# EAGLE board PCB_V2 (EAGLE 9.7.0)
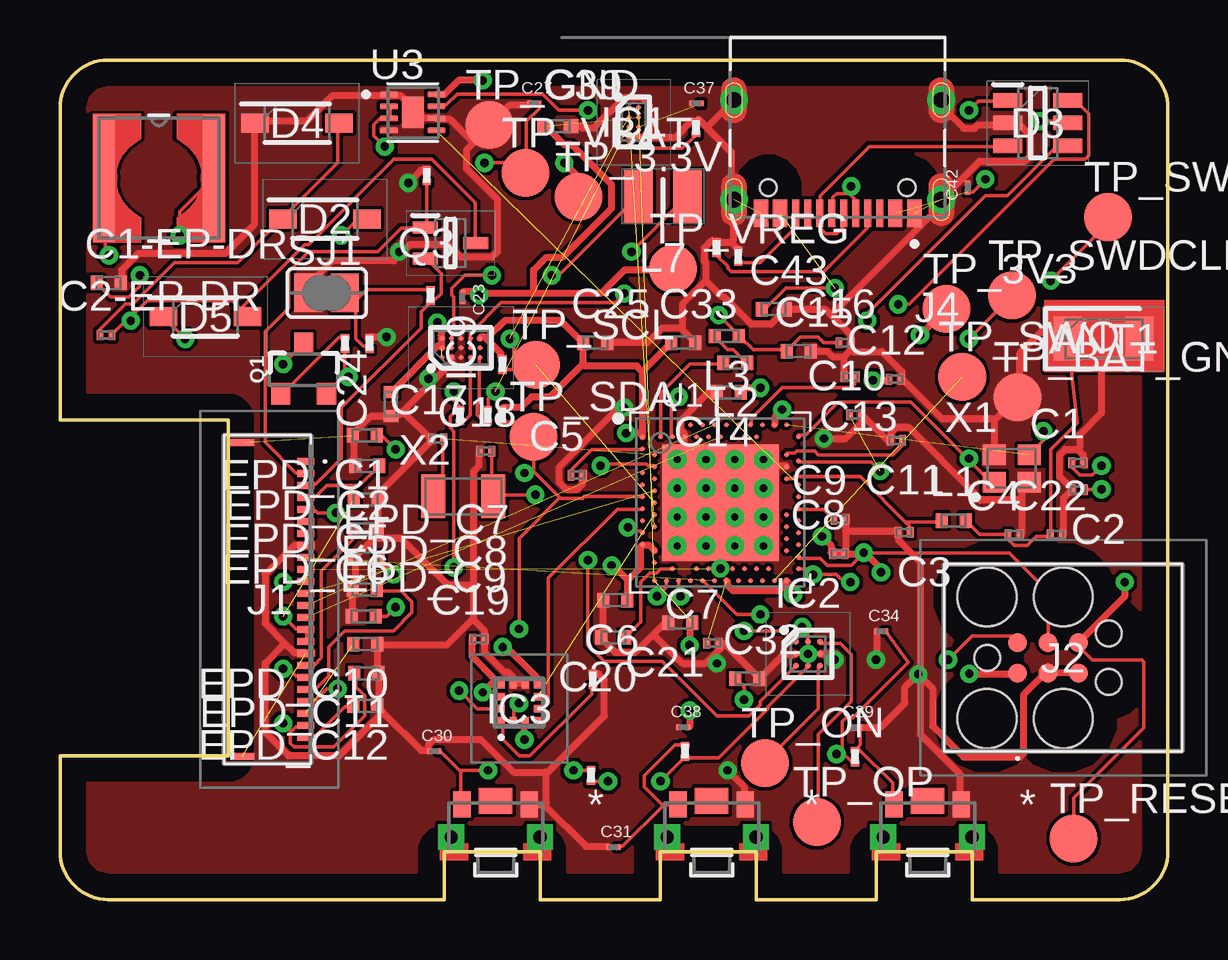
[diagram p0: board, top side]
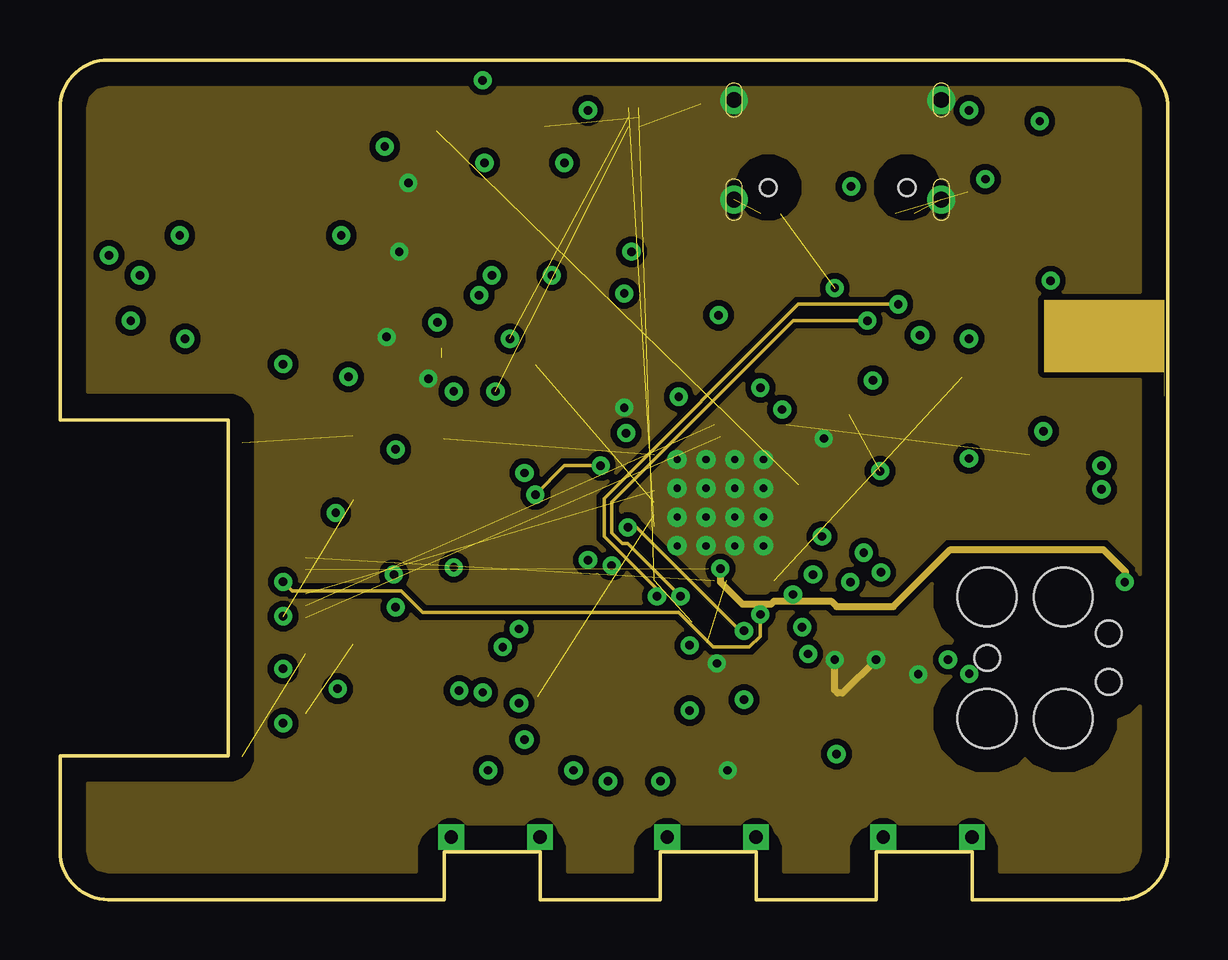
[diagram p1: board, inner layer Route2]
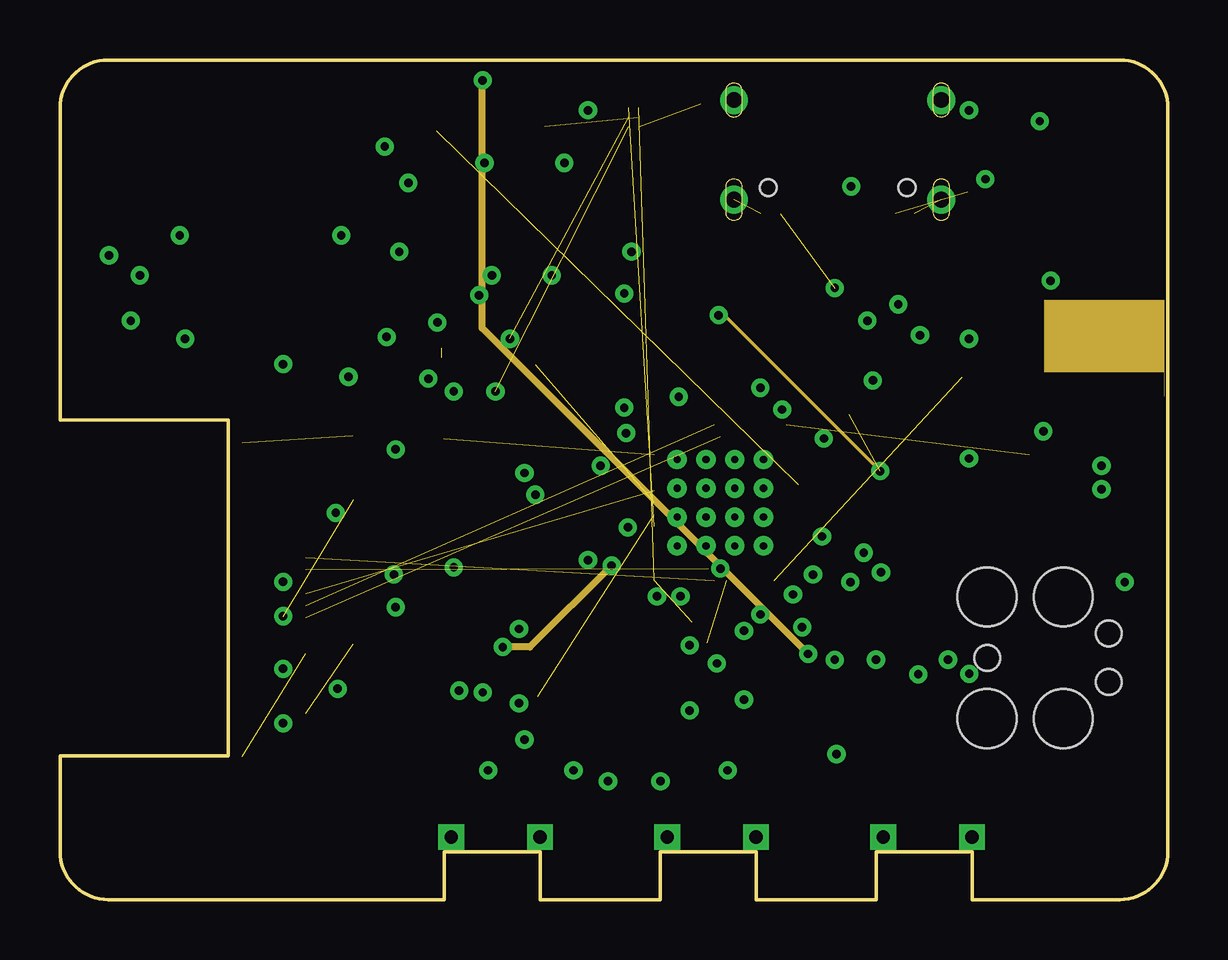
[diagram p2: board, inner layer Route63]
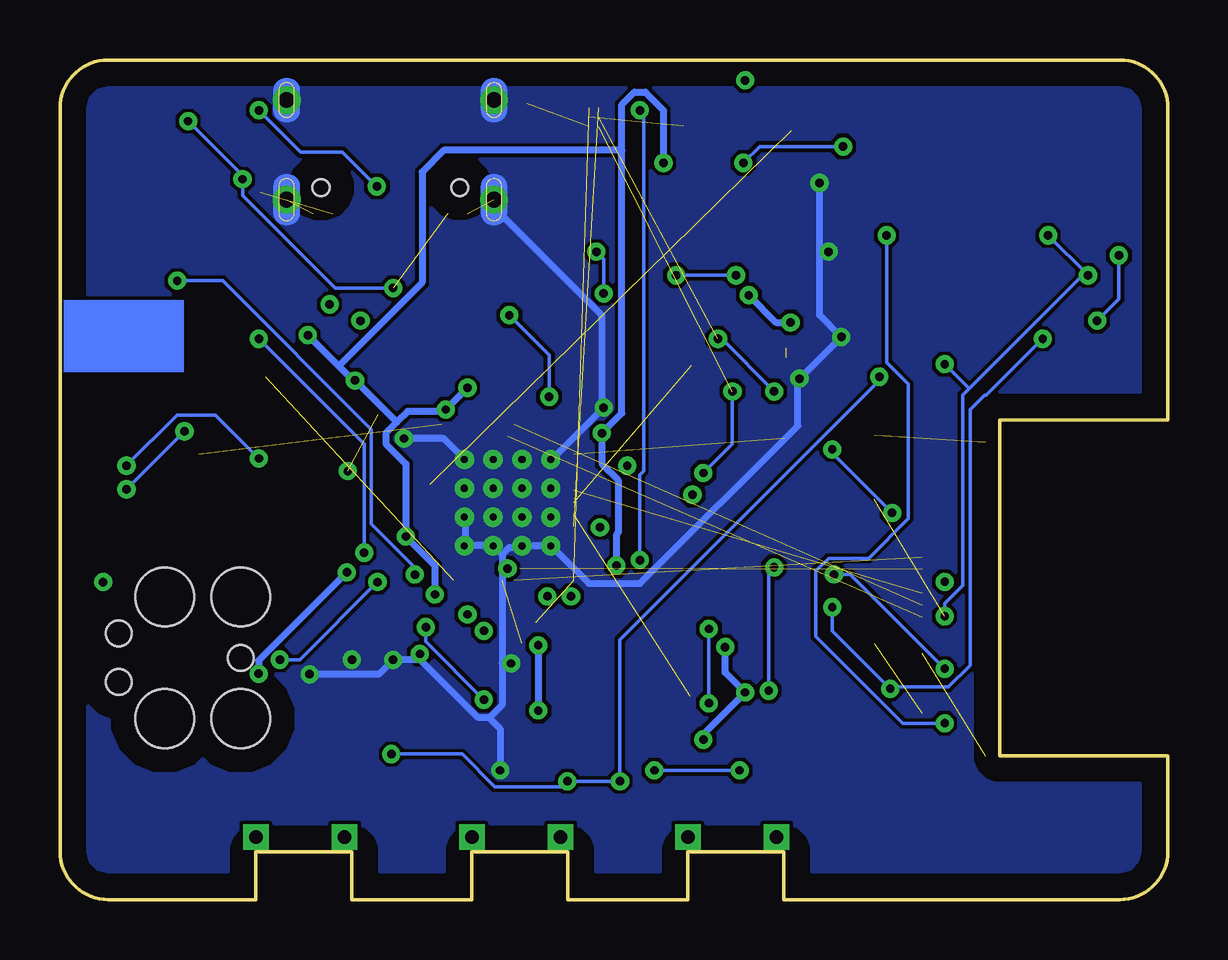
[diagram p3: board, bottom side, seen from below]

Size 46.16 x 35 mm. Coordinates in mm from the lower left corner, seen from the top.
Outline: 0,33 0,20 7,20 7,6 0,6 0,2 arc90 2,0 16,0 16,2 20,2 20,0 25,0 25,2 29,2 29,0 34,0 34,2 38,2 38,0 44.16,0 arc90 46.16,2 46.16,33 arc90 44.16,35 2,35 arc90 0,33
Copper layers (1+2*15+16): Top / Route2 / Route63 / Bottom
Stack-up 4 Layer Stack: Top SilkScreen Epoxy Ink / Top SolderMask SR:Green 0.0254mm Dk 4.3 / Top Surface Finish Lead-Free 0.02mm / Top CuFoil:007 0.035mm / Dielectric-1 Prepreg:001 0.064mm / Dielectric-2 Prepreg:001 0.064mm / Route2 CuFoil:007 0.035mm / Dielectric-3 Core:066 0.711mm / Route63 CuFoil:007 0.035mm / Dielectric-4 Prepreg:001 0.064mm / Dielectric-5 Prepreg:001 0.064mm / Bottom CuFoil:007 0.035mm / Bottom Surface Finish Lead-Free 0.02mm / Bottom SolderMask SR:Green 0.0254mm Dk 4.3 / Bottom SilkScreen Epoxy Ink
Design rules: minimum copper width classes=1 0.3mm, minimum copper width 0.15mm, minimum drill size 0.35mm, copper clearance wire_polygon to wire_polygon 6mil, copper clearance wire_polygon to pad_smd 6mil, copper clearance wire_polygon to via 6mil, copper clearance pad_smd to pad_smd 6mil, copper clearance pad_smd to via 6mil, copper clearance via to via 6mil, copper clearance smd to pad (same net) 6mil, copper clearance smd to via (same net) 6mil, copper clearance smd to smd (same net) 6mil, dimension clearance 40mil, via restrict clearance 0mil, restrict clearance 0mil, drill distance 6mil, keepout clearance 0mil
Net classes: 1 POWER: width 0.3 mm

## Footprints (pad centres in the part's own frame; a part is rotated, then mirrored left to right if it is on the bottom)
2450AT18B100E_ANTC3216X140N = smd 1.15 x 1.8: 1 -1.5,0; 2 1.5,0
NORDIC_NRF_3_RESC0201_L = smd 0.28 x 0.43: 1 -0.255,0; 2 0.255,0
NORDIC_NRF_3_RESC0402_L = smd 0.5 x 0.6: 1 -0.5,0; 2 0.5,0
GRM011R60J152KE01L_2_CAPC0201X13N = smd 0.22 x 0.23: 1 -0.185,0; 2 0.185,0
NORDIC_NRF_3_RESC0402_N = smd 0.6 x 0.6: 1 -0.55,0; 2 0.55,0
ESP32_C6_LIBRARY_5_SOD3716X135N = smd 1.15 x 0.8: 1 -1.75,0; 2 1.75,0
ESP32_C6_LIBRARY_3_SOT95P280X145-6N = smd 1.2 x 0.6: 1 -1.25,0.95; 2 -1.25,0; 3 -1.25,-0.95; 4 1.25,-0.95; 5 1.25,0; 6 1.25,0.95
BQ25180YBGR_BGA8C40P2X4_100X155X50 = smd 0.2 x 0.2: A1 -0.2,0.6; A2 0.2,0.6; B1 -0.2,0.2; B2 0.2,0.2; C1 -0.2,-0.2; C2 0.2,-0.2; D1 -0.2,-0.6; D2 0.2,-0.6
DRV2605YZFR_BGA9C50P3X3_144X144X62 = smd 0.25 x 0.25: A1 -0.5,0.5; A2 0,0.5; A3 0.5,0.5; B1 -0.5,0; B2 0,0; B3 0.5,0; C1 -0.5,-0.5; C2 0,-0.5; C3 0.5,-0.5
BMA423_BMA423 = smd 0.3 x 0.35: 1 -0.75,-0.775; 2 -0.25,-0.775; 3 0.25,-0.775; 4 0.75,-0.775; 7 0.75,0.775; 8 0.25,0.775; 9 -0.25,0.775; 10 -0.75,0.775 | smd 0.35 x 0.3: 5 0.775,-0.25; 6 0.775,0.25; 11 -0.775,0.25; 12 -0.775,-0.25
RT6160AWSC_BGA15C40P3X5_140X230X60 = smd 0.216 x 0.216: A1 -0.4,0.8; A2 0,0.8; A3 0.4,0.8; B1 -0.4,0.4; B2 0,0.4; B3 0.4,0.4; C1 -0.4,0; C2 0,0; C3 0.4,0; D1 -0.4,-0.4; D2 0,-0.4; D3 0.4,-0.4; E1 -0.4,-0.8; E2 0,-0.8; E3 0.4,-0.8
503480-2400_5034802400 = smd 0.3 x 0.7: 1 -5.75,1.525; 2 -5.25,1.525; 3 -4.75,1.525; 4 -4.25,1.525; 5 -3.75,1.525; 6 -3.25,1.525; 7 -2.75,1.525; 8 -2.25,1.525; 9 -1.75,1.525; 10 -1.25,1.525; 11 -0.75,1.525; 12 -0.25,1.525; 13 0.25,1.525; 14 0.75,1.525; 15 1.25,1.525; 16 1.75,1.525; 17 2.25,1.525; 18 2.75,1.525; 19 3.25,1.525; 20 3.75,1.525; 21 4.25,1.525; 22 4.75,1.525; 23 5.25,1.525; 24 5.75,1.525 | smd 0.3 x 1: MP1 -6.54,-1.125; MP2 6.54,-1.125
TC2030-IDC_TC2030IDC = smd 0.783 x 0.783: 1 -0.953,-0.635; 2 -0.953,0.635; 3 0.317,-0.635; 4 0.317,0.635; 5 1.588,-0.635; 6 1.588,0.635 | hole 2.451: -2.223,-2.54; -2.223,2.54; 0.952,-2.54; 0.952,2.54 | hole 1.067: -2.223,0; 2.857,-1.016; 2.857,1.016
KH-TYPE-C-16P_KINGHELM_KH-TYPE-C-16P = smd 0.6 x 1.15: A1_B12 -3.2,4.725; A4_B9 -2.4,4.725; A9_B4 2.4,4.725; A12_B1 3.2,4.725 | smd 0.3 x 1.15: A5 -1.25,4.725; A6 -0.25,4.725; A7 0.25,4.725; A8 1.25,4.725; B5 1.75,4.725; B6 0.75,4.725; B7 -0.75,4.725; B8 -1.75,4.725 | drill 0.65 pad 1.05: SH1 -4.32,0; SH2 4.32,0; SH3 -4.32,4.15; SH4 4.32,4.15 | hole 0.7: -2.89,3.65; 2.89,3.65
NORDIC_NRF_2_RESC0402_L = smd 0.5 x 0.6: 1 -0.5,0; 2 0.5,0
ESP32_C6_LIBRARY_2_IND_4828-WE-TPC_WRE = smd 0.9 x 5.3: 1 -2.286,0; 2 2.286,0
MLP2016SR47MT0S1_INDC2016X100N = smd 1.2 x 2.2: 1 -1.028,0; 2 1.028,0
ESP32_C6_LIBRARY_4_ESP32_C6_LIBRARY_4_ESP32_C6_LIBRARY_4_ESP32_C6_LIBRARY_4_ESP32_WROVER_SPARKFUN-DISCRETESEMI_SOT23-3 = smd 0.8 x 0.9: 1 -0.95,-1; 2 0.95,-1; 3 0,1.1
ESP32_C6_LIBRARY_6_SOT65P210X110-3N = smd 1.05 x 0.5: 1 -1.05,0.65; 2 -1.05,-0.65; 3 1.05,0
CPF0201D7K68C1_0201 = smd 0.35 x 0.25: 1 0,0.275; 2 0,-0.275
ERA-1AEB3401C_0201 = smd 0.35 x 0.25: 1 0,0.275; 2 0,-0.275
ESP32_C6_LIBRARY_7_JUMPER_SJ = smd 1.168 x 1.6: 1 -0.762,0; 2 0.762,0
2025-10-22_07-23-44_LIBRARY_SW_EVP-AKE31A_PAN = smd 0.711 x 1.092: 1 -1.4,-0.972; 2 1.4,-0.972 | drill 0.559 pad 0.914 square: 3 -1.848,0.381; 4 1.848,0.381 | smd 1.397 x 1.092: 5 0,-1.124
HECTOR_WATCH_1_TP20R = smd 2 x 2: TP 0,0
NORDIC_NRF_4_AQFN50P700X700X85_HS-74N = smd 4.85 x 4.85: P$74 0,0 | drill 0.3 pad 0.6: P$75 -1.8,1.8; P$76 -0.6,1.8; P$77 0.6,1.8; P$78 1.8,1.8; P$79 -1.8,0.6; P$80 -0.6,0.6; P$81 0.6,0.6; P$82 1.8,0.6; P$83 -1.8,-0.6; P$84 -0.6,-0.6; P$85 0.6,-0.6; P$86 1.8,-0.6; P$87 -1.8,-1.8; P$88 -0.6,-1.8; P$89 0.6,-1.8; P$90 1.8,-1.8 | smd 0.2 x 0.2: P$A8 -1.25,3.25; P$A10 -0.75,3.25; P$A12 -0.25,3.25; P$A14 0.25,3.25; P$A16 0.75,3.25; P$A18 1.25,3.25; P$A20 1.75,3.25; P$A22 2.25,3.25; P$A23 2.75,3.25; P$AA24 3.25,-2.25; P$AB2 -2.75,-2.5; P$AC5 -2,-2.75; P$AC9 -1,-2.75; P$AC11 -0.5,-2.75; P$AC13 0,-2.75; P$AC15 0.5,-2.75; P$AC17 1,-2.75; P$AC19 1.5,-2.75; P$AC21 2,-2.75; P$AC24 3.25,-2.75; P$AD2 -2.75,-3.25; P$AD4 -2.25,-3.25; P$AD6 -1.75,-3.25; P$AD8 -1.25,-3.25; P$AD10 -0.75,-3.25; P$AD12 -0.25,-3.25; P$AD14 0.25,-3.25; P$AD16 0.75,-3.25; P$AD18 1.25,-3.25; P$AD20 1.75,-3.25; P$AD22 2.25,-3.25; P$AD23 2.75,-3.25; P$B1 -3.25,2.75; P$B3 -2.5,2.75; P$B5 -2,2.75; P$B7 -1.5,2.75; P$B9 -1,2.75; P$B11 -0.5,2.75; P$B13 0,2.75; P$B15 0.5,2.75; P$B17 1,2.75; P$B19 1.5,2.75; P$B24 3.25,2.75; P$C1 -3.25,2.25; P$D2 -2.75,2; P$D23 2.75,2; P$E24 3.25,1.75; P$F2 -2.75,1.5; P$F23 2.75,1.5; P$G1 -3.25,1.25; P$H2 -2.75,1; P$H23 2.75,1; P$J1 -3.25,0.75; P$J24 3.25,0.75; P$K2 -2.75,0.5; P$L1 -3.25,0.25; P$L24 3.25,0.25; P$M2 -2.75,0; P$N1 -3.25,-0.25; P$N24 3.25,-0.25; P$P2 -2.75,-0.5; P$P23 2.75,-0.5; P$R1 -3.25,-0.75; P$R24 3.25,-0.75; P$T2 -2.75,-1; P$T23 2.75,-1; P$U1 -3.25,-1.25; P$U24 3.25,-1.25; P$V23 2.75,-1.5; P$W1 -3.25,-1.75; P$W24 3.25,-1.75; P$Y2 -2.75,-2; P$Y23 2.75,-2
ESP32_C6_LIBRARY_SON50P200X200X80-9N = smd 0.76 x 0.27: 1 -0.985,0.75; 2 -0.985,0.25; 3 -0.985,-0.25; 4 -0.985,-0.75; 5 0.985,-0.75; 6 0.985,-0.25; 7 0.985,0.25; 8 0.985,0.75 | smd 0.9 x 1.3: 9 0,0
NORDIC_NRF_BT-XTAL_2016_N = smd 0.95 x 0.85: 1 -0.725,-0.575; 2 0.725,-0.575; 3 0.725,0.575; 4 -0.725,0.575
NORDIC_NRF_1_XTAL_3215_N = smd 1 x 1.8: 1 -1.25,0; 2 1.25,0

## Placement (x,y rotation side)
ANT1  2450AT18B100E_2450AT18B100E  [2450AT18B100E_ANTC3216X140N]  43.49,23.38 0 top
C1  12pF  [NORDIC_NRF_3_RESC0201_L]  42.41,18.21 0 top
C1-EP-DR  10uF  [NORDIC_NRF_3_RESC0402_L]  2.04,25.71 0 top
C2  12pF  [NORDIC_NRF_3_RESC0201_L]  42.42,17.08 180 top
C2-EP-DR  4.7uF/25V  [NORDIC_NRF_3_RESC0201_L]  1.92,23.53 0 top
C3  1pF  [NORDIC_NRF_3_RESC0201_L]  35.17,15.31 180 top
C4  1pF  [NORDIC_NRF_3_RESC0201_L]  39.75,15.21 0 top
C5  100nF  [NORDIC_NRF_3_RESC0201_L]  21.55,17.69 0 top
C6  4.7uF  [NORDIC_NRF_3_RESC0402_L]  23.14,12.48 180 top
C7  100nF  [NORDIC_NRF_3_RESC0201_L]  27.2,10.69 0 top
C8  100nF  [NORDIC_NRF_3_RESC0201_L]  32.45,14.41 0 top
C9  820pF  [NORDIC_NRF_3_RESC0201_L]  32.5,15.86 0 top
C10  N.C.  [NORDIC_NRF_3_RESC0201_L]  33.15,20.21 0 top
C11  100pF  [NORDIC_NRF_3_RESC0201_L]  34.85,19.14 180 top
C12  100nF  [NORDIC_NRF_3_RESC0201_L]  34.8,21.69 0 top
C13  N.C.  [NORDIC_NRF_3_RESC0201_L]  32.93,21.79 180 top
C14  4.7uF  [NORDIC_NRF_3_RESC0402_L]  27.87,21.14 180 top
C15  1.0uF  [NORDIC_NRF_3_RESC0402_L]  30.78,22.86 0 top
C16  47nF  [NORDIC_NRF_3_RESC0201_L]  32.71,23.21 0 top
C17  12pF  [NORDIC_NRF_3_RESC0201_L]  15.73,19.21 0 top
C18  12pF  [NORDIC_NRF_3_RESC0201_L]  17.73,18.69 0 top
C19  100nF  [NORDIC_NRF_3_RESC0201_L]  17.45,10.86 0 top
C20  4.7uF  [NORDIC_NRF_3_RESC0402_L]  23.05,10.93 180 top
C21  4.7uF  [NORDIC_NRF_3_RESC0402_L]  25.84,11.54 180 top
C22  N.C.  [NORDIC_NRF_3_RESC0201_L]  41.51,15.21 0 top
C23  0.1uF  [GRM011R60J152KE01L_2_CAPC0201X13N]  16.76,25.11 270 top
C24  10uF  [NORDIC_NRF_3_RESC0402_L]  13.79,20.66 90 top
C25  22uF  [NORDIC_NRF_3_RESC0402_L]  22.31,23.21 0 top
C27  0.1uF  [GRM011R60J152KE01L_2_CAPC0201X13N]  19.76,33.18 0 top
C29  1uF  [GRM011R60J152KE01L_2_CAPC0201X13N]  33.14,7.18 0 top
C30  1uF  [GRM011R60J152KE01L_2_CAPC0201X13N]  15.6,6.18 0 top
C31  1uF  [GRM011R60J152KE01L_2_CAPC0201X13N]  23.06,2.18 0 top
C32  1uF  [NORDIC_NRF_3_RESC0402_L]  28.64,9.21 0 top
C33  22uF  [NORDIC_NRF_3_RESC0402_L]  25.96,23.21 0 top
C34  0.1uF  [GRM011R60J152KE01L_2_CAPC0201X13N]  34.22,11.18 0 top
C37  1uF  [GRM011R60J152KE01L_2_CAPC0201X13N]  26.52,33.18 0 top
C38  1uF  [GRM011R60J152KE01L_2_CAPC0201X13N]  25.98,7.18 0 top
C39  10uF  [NORDIC_NRF_3_RESC0402_N]  20.74,32.24 0 top
C42  0.1uF  [GRM011R60J152KE01L_2_CAPC0201X13N]  37.82,29.68 90 top
C43  4.7uF  [NORDIC_NRF_3_RESC0402_L]  29.73,24.61 0 top
D2  MBR0530  [ESP32_C6_LIBRARY_5_SOD3716X135N]  11.04,28.37 0 top
D3  USBLC6-2SC6Y  [ESP32_C6_LIBRARY_3_SOT95P280X145-6N]  40.74,32.37 0 top
D4  MBR0530  [ESP32_C6_LIBRARY_5_SOD3716X135N]  9.88,32.37 0 top
D5  MBR0530  [ESP32_C6_LIBRARY_5_SOD3716X135N]  6.06,24.3 0 top
EPD_C1  1uF/50V  [NORDIC_NRF_3_RESC0402_L]  12.71,19.35 180 top
EPD_C2  1uF/50V  [NORDIC_NRF_3_RESC0402_L]  12.8,18.08 180 top
EPD_C5  0.1uF/50V  [NORDIC_NRF_3_RESC0402_L]  12.74,16.68 180 top
EPD_C6  1uF/50V  [NORDIC_NRF_3_RESC0402_L]  12.73,15.42 180 top
EPD_C7  1uF/50V  [NORDIC_NRF_3_RESC0402_L]  12.78,14.22 0 top
EPD_C8  1uF/50V  [NORDIC_NRF_3_RESC0402_L]  12.7,12.92 0 top
EPD_C9  1uF/50V  [NORDIC_NRF_3_RESC0402_L]  12.66,11.81 0 top
EPD_C10  1uF/50V  [NORDIC_NRF_3_RESC0402_L]  12.71,10.65 180 top
EPD_C11  1uF/50V  [NORDIC_NRF_3_RESC0402_L]  12.76,9.44 180 top
EPD_C12  1uF/50V  [NORDIC_NRF_3_RESC0402_L]  12.72,8.08 180 top
IC1  BQ25180YBGR_BQ25180YBGR  [BQ25180YBGR_BGA8C40P2X4_100X155X50]  23.91,32.41 0 top
IC2  DRV2605YZFR  [DRV2605YZFR_BGA9C50P3X3_144X144X62]  31.17,10.24 0 top
IC3  BMA421  [BMA423_BMA423]  19.13,8.21 0 top
IC9  RT6160AWSC  [RT6160AWSC_BGA15C40P3X5_140X230X60]  16.71,23 90 top
J1  503480-2400  [503480-2400_5034802400]  8.72,12.51 270 top
J2  TC2030-IDC_TC2030-IDC  [TC2030-IDC_TC2030IDC]  40.85,10.08 0 top
J4  KH-TYPE-C-16P  [KH-TYPE-C-16P_KINGHELM_KH-TYPE-C-16P]  32.4,33.33 180 top
L1  3.9nH  [NORDIC_NRF_2_RESC0402_L]  37.24,15.8 0 top
L2  10uH  [NORDIC_NRF_2_RESC0402_L]  28.14,22.38 180 top
L3  15nH  [NORDIC_NRF_2_RESC0402_L]  27.79,23.49 180 top
L5  68uH  [ESP32_C6_LIBRARY_2_IND_4828-WE-TPC_WRE]  4.12,30.07 0 top
L7  FTC252012SR47MBCA  [MLP2016SR47MT0S1_INDC2016X100N]  25.12,29.32 0 top
Q1  20V/4.2A/52mΩ/1.4W  [ESP32_C6_LIBRARY_4_ESP32_C6_LIBRARY_4_ESP32_C6_LIBRARY_4_ESP32_C6_LIBRARY_4_ESP32_WROVER_SPARKFUN-DISCRETESEMI_SOT23-3]  10.15,22.08 0 top
Q3  SI1308EDL-T1-GE3  [ESP32_C6_LIBRARY_6_SOT65P210X110-3N]  16.27,27.37 0 top
R1_EP_DR  0.47  [CPF0201D7K68C1_0201]  15.44,25.18 0 top
R1_TYPE_SEL  2.2  [CPF0201D7K68C1_0201]  12.9,23.18 0 top
R1_USB  5K1  [ERA-1AEB3401C_0201]  27.36,27.18 0 top
R2  0  [ERA-1AEB3401C_0201]  17.82,20.18 0 top
R2_EP_DR  10K  [CPF0201D7K68C1_0201]  15.28,30.18 0 top
R2_USB  5K1  [CPF0201D7K68C1_0201]  28.26,26.82 180 top
R3  0  [CPF0201D7K68C1_0201]  22.2,9.18 0 top
R4  0  [ERA-1AEB3401C_0201]  16.66,20.18 0 top
R5  10K  [ERA-1AEB3401C_0201]  22.12,5.18 0 top
R7  10K  [ERA-1AEB3401C_0201]  33.13,5.96 0 top
R8  10K  [ERA-1AEB3401C_0201]  26.04,6.18 0 top
R9  10K  [CPF0201D7K68C1_0201]  26.5,32.18 0 top
R17  3K3  [CPF0201D7K68C1_0201]  18.44,22.31 0 top
R18  3K3  [CPF0201D7K68C1_0201]  18.42,20.18 0 top
R_PWR_EPD  10K  [CPF0201D7K68C1_0201]  11.88,23.18 0 top
SJ1  [ESP32_C6_LIBRARY_7_JUMPER_SJ]  11.11,25.29 0 top
SW_DN  2025-10-22_07-23-44_LIBRARY_EVP-AKE31ASW_EVP-AKE31A_PAN  [2025-10-22_07-23-44_LIBRARY_SW_EVP-AKE31A_PAN]  36.15,2.99 180 top
SW_ENT  2025-10-22_07-23-44_LIBRARY_EVP-AKE31ASW_EVP-AKE31A_PAN  [2025-10-22_07-23-44_LIBRARY_SW_EVP-AKE31A_PAN]  27.15,2.99 180 top
SW_UP  2025-10-22_07-23-44_LIBRARY_EVP-AKE31ASW_EVP-AKE31A_PAN  [2025-10-22_07-23-44_LIBRARY_SW_EVP-AKE31A_PAN]  18.15,2.99 180 top
TP_3.3V  HECTOR_WATCH_1_TPTP20R  [HECTOR_WATCH_1_TP20R]  21.61,29.29 0 top
TP_3V3  HECTOR_WATCH_1_TPTP20R  [HECTOR_WATCH_1_TP20R]  36.94,24.62 0 top
TP_BAT_GND  HECTOR_WATCH_1_TPTP20R  [HECTOR_WATCH_1_TP20R]  39.89,20.94 0 top
TP_GND  HECTOR_WATCH_1_TPTP20R  [HECTOR_WATCH_1_TP20R]  17.89,32.29 0 top
TP_ON  HECTOR_WATCH_1_TPTP20R  [HECTOR_WATCH_1_TP20R]  29.38,5.69 0 top
TP_OP  HECTOR_WATCH_1_TPTP20R  [HECTOR_WATCH_1_TP20R]  31.53,3.23 0 top
TP_RESET  HECTOR_WATCH_1_TPTP20R  [HECTOR_WATCH_1_TP20R]  42.24,2.54 0 top
TP_SCL  HECTOR_WATCH_1_TPTP20R  [HECTOR_WATCH_1_TP20R]  19.83,22.29 0 top
TP_SDA  HECTOR_WATCH_1_TPTP20R  [HECTOR_WATCH_1_TP20R]  19.72,19.29 0 top
TP_SWDCLK  HECTOR_WATCH_1_TPTP20R  [HECTOR_WATCH_1_TP20R]  39.66,25.18 0 top
TP_SWDIO  HECTOR_WATCH_1_TPTP20R  [HECTOR_WATCH_1_TP20R]  43.66,28.45 0 top
TP_SWO  HECTOR_WATCH_1_TPTP20R  [HECTOR_WATCH_1_TP20R]  37.59,21.79 0 top
TP_VBAT  HECTOR_WATCH_1_TPTP20R  [HECTOR_WATCH_1_TP20R]  19.39,30.29 0 top
TP_VREG  HECTOR_WATCH_1_TPTP20R  [HECTOR_WATCH_1_TP20R]  25.55,26.29 0 top
U1  NRF52840_QF  [NORDIC_NRF_4_AQFN50P700X700X85_HS-74N]  27.51,16.55 0 top
U3  MAX17048G+T10  [ESP32_C6_LIBRARY_SON50P200X200X80-9N]  14.7,32.81 0 top
X1  32MHz  [NORDIC_NRF_BT-XTAL_2016_N]  39.66,17.97 0 top
X2  32.768kHz  [NORDIC_NRF_1_XTAL_3215_N]  16.81,16.81 0 top

## Library data of the parts
ANT1 = InkTime_v5; ARROW_PART_NUMBER: 2450AT18B100E; ARROW_PRICE-STOCK: https://www.arrow.com/en/products/2450at18b100e/johanson-dielectrics?utm_currency=USD&region=nac; DESCRIPTION: Antennas 2.45GHz ANTENNA; HEIGHT: 1.4mm; MANUFACTURER_NAME: JOHANSON TECHNOLOGY; MANUFACTURER_PART_NUMBER: 2450AT18B100E; MOUSER_PART_NUMBER: 609-2450AT18B100E; MOUSER_PRICE-STOCK: https://www.mouser.co.uk/ProductDetail/Johanson-Technology/2450AT18B100E?qs=yCnrNFeXz%252Bh5MFsFIXGZGA%3D%3D
C1 C1-EP-DR C2 C2-EP-DR C3-C22 C24 C25 C32 C33 C39 C43 EPD_C1 EPD_C2 EPD_C5-EPD_C12 L1-L3 R1_EP_DR R1_TYPE_SEL R1_USB R2 R2_EP_DR R2_USB R3-R5 R7-R9 R17 R18 R_PWR_EPD SJ1 TP_3.3V TP_3V3 TP_BAT_GND TP_GND TP_ON TP_OP TP_RESET TP_SCL TP_SDA TP_SWDCLK TP_SWDIO TP_SWO TP_VBAT TP_VREG U1 X1 X2 = InkTime_v5
C23 C27 C29-C31 C34 C37 C38 C42 = InkTime_v5; AVAILABILITY: In Stock; CHECK_PRICES: https://www.snapeda.com/parts/GRM011R60J152KE01L/Murata/view-part/?ref=eda; DESCRIPTION: SMD Capacitor X5R(EIA) with Capacitance: 1500pF Tol. 10%. Rated Voltage: 6.3Vdc; MF: Murata; MP: GRM011R60J152KE01L; PACKAGE: 0201 Murata; PRICE: None; SNAPEDA_LINK: https://www.snapeda.com/parts/GRM011R60J152KE01L/Murata/view-part/?ref=snap
D2 D4 D5 = InkTime_v5; AVAILABILITY: In Stock; CHECK_PRICES: https://www.snapeda.com/parts/MBR0530/Onsemi/view-part/?ref=eda; DESCRIPTION: Diode Schottky 30 V 500mA Surface Mount SOD-123; MF: ON Semiconductor; MP: MBR0530; PACKAGE: SOD-123-2 ON Semiconductor; PRICE: None; PURCHASE-URL: https://www.snapeda.com/api/url_track_click_mouser/?unipart_id=179458&manufacturer=ON Semiconductor&part_name=MBR0530&search_term=None; SNAPEDA_LINK: https://www.snapeda.com/parts/MBR0530/Onsemi/view-part/?ref=snap
D3 = InkTime_v5; AVAILABILITY: In Stock; CHECK_PRICES: https://www.snapeda.com/parts/USBLC6-2SC6Y/STMicroelectronics/view-part/?ref=eda; DESCRIPTION: 17V Clamp 5A (8/20µs) Ipp Tvs Diode Surface Mount SOT-23-6; MF: STMicroelectronics; MP: USBLC6-2SC6Y; PACKAGE: SOT-23-6 STMicroelectronics; PRICE: None; SNAPEDA_LINK: https://www.snapeda.com/parts/USBLC6-2SC6Y/STMicroelectronics/view-part/?ref=snap
IC1 = InkTime_v5; ARROW_PART_NUMBER: BQ25180YBGR; ARROW_PRICE-STOCK: https://www.arrow.com/en/products/bq25180ybgr/texas-instruments?utm_currency=USD&region=nac; DESCRIPTION: Charger IC Lithium Ion/Polymer, Lithium Iron Phosphate 8-DSBGA (1.6x1.1); HEIGHT: 0.5mm; MANUFACTURER_NAME: Texas Instruments; MANUFACTURER_PART_NUMBER: BQ25180YBGR; MOUSER_PART_NUMBER: 595-BQ25180YBGR; MOUSER_PRICE-STOCK: https://www.mouser.co.uk/ProductDetail/Texas-Instruments/BQ25180YBGR?qs=doiCPypUmgEWjAK%252BJAX6Tw%3D%3D
IC2 = InkTime_v5; ARROW_PART_NUMBER: DRV2605YZFR; ARROW_PRICE-STOCK: https://www.arrow.com/en/products/drv2605yzfr/texas-instruments?region=nac; DESCRIPTION: Haptic Driver for ERM/LRA with Built-In Library and Smart Loop Architecture; HEIGHT: 0.625mm; MANUFACTURER_NAME: Texas Instruments; MANUFACTURER_PART_NUMBER: DRV2605YZFR
IC3 = InkTime_v5; ARROW_PART_NUMBER: BMA423; ARROW_PRICE-STOCK: https://www.arrow.com/en/products/bma423/bosch; DESCRIPTION: Accelerometers Triaxial low-g 12bit Acceleration Sensor; HEIGHT: 1mm; MANUFACTURER_NAME: BOSCH; MANUFACTURER_PART_NUMBER: BMA423; MOUSER_PART_NUMBER: 262-BMA423; MOUSER_PRICE-STOCK: https://www.mouser.co.uk/ProductDetail/Bosch-Sensortec/BMA423?qs=HXFqYaX1Q2xC%252BSgeGoX3mg%3D%3D
IC9 = InkTime_v5; DESCRIPTION: Buck-Boost Regulator Positive Output Step-Up/Step-Down I2C DC-DC Controller IC 15-WL-CSP (BSC) (1.4x2.3); HEIGHT: 0.6mm; MANUFACTURER_NAME: RICHTEK; MANUFACTURER_PART_NUMBER: RT6160AWSC; MOUSER_PART_NUMBER: 835-RT6160AWSC; MOUSER_PRICE-STOCK: https://www.mouser.co.uk/ProductDetail/Richtek/RT6160AWSC?qs=amGC7iS6iy%2FLd9PSoixZXQ%3D%3D
J1 = InkTime_v5; DESCRIPTION: FFC & FPC Connectors 0.5mm FPC RA SMT Dual Contact 24Ckt; HEIGHT: 1.87mm; MANUFACTURER_NAME: Molex; MANUFACTURER_PART_NUMBER: 503480-2400; MOUSER_PART_NUMBER: 538-503480-2400; MOUSER_PRICE-STOCK: https://www.mouser.co.uk/ProductDetail/Molex/503480-2400?qs=OAhjpuo3Vu7efIoxFh9AOw%3D%3D
J2 = InkTime_v5; DESCRIPTION: CABLE ADAPTER 6 POS; HEIGHT: 19mm; MANUFACTURER_NAME: Tag Connect; MANUFACTURER_PART_NUMBER: TC2030-IDC
J4 = InkTime_v5; AVAILABILITY: Not in stock; CHECK_PRICES: https://www.snapeda.com/parts/KH-TYPE-C-16P/Kinghelm/view-part/?ref=eda; MF: kinghelm; MP: KH-TYPE-C-16P; PACKAGE: None; PRICE: None; SNAPEDA_LINK: https://www.snapeda.com/parts/KH-TYPE-C-16P/Kinghelm/view-part/?ref=snap
L5 = InkTime_v5; COPYRIGHT: Copyright (C) 2024 Ultra Librarian. All rights reserved.; MANUFACTURER_PART_NUMBER: 744043680; MFR_NAME: Wurth Electronics
L7 = InkTime_v5; DESCRIPTION: SMD / SMT Inductors (Coils), L=0.47?H, L x W x T :; HEIGHT: 1mm; JLCPCB: https://jlcpcb.com/partdetail/6763488-FTC252012SR47MBCA/C5832368; MANUFACTURER_NAME: TDK; MANUFACTURER_PART_NUMBER: FTC252012SR47MBCA
Q1 = InkTime_v5; PROD_ID: TRAN-14388
Q3 = InkTime_v5; AVAILABILITY: In Stock; CHECK_PRICES: https://www.snapeda.com/parts/SI1308EDL-T1-GE3/Vishay+Siliconix/view-part/?ref=eda; DESCRIPTION: Si1308EDL-T1-GE3 N-channel MOSFET Transistor, 1.5 A, 30 V, 3-Pin SC-70 | Siliconix / Vishay SI1308EDL-T1-GE3; MF: Vishay Siliconix; MP: SI1308EDL-T1-GE3; PACKAGE: SOT-323 Vishay Semiconductor; PRICE: None; PURCHASE-URL: https://www.snapeda.com/api/url_track_click_mouser/?unipart_id=274603&manufacturer=Vishay Siliconix&part_name=SI1308EDL-T1-GE3&search_term=None; SNAPEDA_LINK: https://www.snapeda.com/parts/SI1308EDL-T1-GE3/Vishay+Siliconix/view-part/?ref=snap
SW_DN SW_ENT SW_UP = InkTime_v5; COPYRIGHT: Copyright (C) 2025 Ultra Librarian. All rights reserved.; DIGI-KEY_PART_NUMBER_1: P123437TR-ND; DIGI-KEY_PART_NUMBER_2: P123437CT-ND; DIGI-KEY_PART_NUMBER_3: P123437DKR-ND; MANUFACTURER_NAME: Panasonic; MANUFACTURER_PART_NUMBER: EVP-AKE31A
U3 = InkTime_v5; AVAILABILITY: In Stock; CHECK_PRICES: https://www.snapeda.com/parts/MAX17048G+T10/Analog+Devices/view-part/?ref=eda; DESCRIPTION: 3µA 1-Cell/2-Cell Fuel Gauge with ModelGauge; MF: Analog Devices; MP: MAX17048G+T10; PACKAGE: TDFN-8 Maxim; PRICE: None; PURCHASE-URL: https://www.snapeda.com/api/url_track_click_mouser/?unipart_id=329239&manufacturer=Analog Devices&part_name=MAX17048G+T10&search_term=None; SNAPEDA_LINK: https://www.snapeda.com/parts/MAX17048G+T10/Analog+Devices/view-part/?ref=snap

## Nets
3V3/1.7D: C34.2 IC2.C2 Q1.2 R5.2 R7.2 R8.2 R_PWR_EPD.2
3V3/2.4A [POWER]: C6.1 C7.1 C8.1 C12.1 C14.1 C19.1 C25.1 C33.1 IC3.3 IC3.7 IC3.10 IC9.E3 J2.1 R17.1 R18.1 TP_3.3V.TP TP_3V3.TP U1.P$A22 U1.P$AD14 U1.P$AD23 U1.P$B1 U1.P$W1 U1.P$Y2
ALERT: U1.P$J24 U3.5
D+: D3.4 U1.P$AD6
D-: D3.6 U1.P$AD4
DEC1: C5.1 U1.P$C1
DEC3: C11.1 U1.P$D23
DEC4_6: C10.1 C15.1 C16.1 L3.1 U1.P$B5 U1.P$E24
DN: D3.1 J4.A7 J4.B7
DP: D3.3 J4.A6 J4.B6
EPD_3V3: C1-EP-DR.1 EPD_C5.2 J1.15 J1.16 L5.2 Q1.3
EPD_BUSY: J1.9 U1.P$AD12
EPD_CS: J1.12 U1.P$K2
EPD_DC: J1.11 U1.P$AD10
EPD_RST: J1.10 U1.P$AC11
GDR: J1.2 Q3.1 R2_EP_DR.2
GND [POWER]: C1-EP-DR.2 C1.2 C2.2 C3.2 C4.2 C5.2 C6.2 C7.2 C8.2 C9.2 C10.2 C11.2 C12.2 C13.2 C14.2 C15.2 C16.2 C17.1 C18.1 C19.2 C20.2 C21.2 C22.2 C23.2 C24.1 C25.2 C27.1 C29.1 C30.1 C31.1 C32.2 C33.2 C34.1 C37.1 C38.1 C39.2 C42.2 C43.2 D3.2 D4.1 EPD_C1.2 EPD_C2.2 EPD_C5.1 EPD_C6.1 EPD_C7.1 EPD_C8.1 EPD_C9.1 EPD_C10.1 EPD_C11.1 EPD_C12.1 IC1.D2 IC2.B1 IC2.B3 IC3.8 IC3.9 IC9.B1 IC9.C1 IC9.C2 IC9.C3 J1.8 J1.17 J1.MP1 J1.MP2 J2.3 J2.5 J4.A1_B12 J4.A12_B1 J4.SH1 J4.SH2 J4.SH3 J4.SH4 R1_TYPE_SEL.1 R1_USB.1 R2_EP_DR.1 R2_USB.2 R3.1 R9.1 SJ1.1 SW_DN.1 SW_ENT.1 SW_UP.1 TP_BAT_GND.TP TP_GND.TP U1.P$74 U1.P$75 U1.P$76 U1.P$77 U1.P$78 U1.P$79 U1.P$80 U1.P$81 U1.P$82 U1.P$83 U1.P$84 U1.P$85 U1.P$86 U1.P$87 U1.P$88 U1.P$89 U1.P$90 U1.P$B7 U1.P$F23 U3.1 U3.4 U3.6 U3.9 X1.2 X1.4
HAPTIC_EN: IC2.A1 U1.P$U1
IMU_INT1: IC3.5 U1.P$N1
IMU_INT2: IC3.6 U1.P$P2
LX1: IC9.B2 IC9.B3 L7.1
LX2: IC9.D2 IC9.D3 L7.2
MOSI: J1.14 U1.P$B13
N$1: IC1.D1 R9.2
N$3: IC9.D1 R4.2
N$5: IC9.E1 R2.2
N$6: IC3.1 R3.2
N$7: C20.1 U1.P$AC5
N$8: C17.2 U1.P$D2 X2.1
N$9: C18.2 U1.P$F2 X2.2
N$10: C9.1 U1.P$N24
N$11: C3.1 L1.1 U1.P$H23
N$13: C1.1 U1.P$B24 X1.1
N$14: C2.1 U1.P$A23 X1.3
N$15: C2-EP-DR.2 D5.2 L5.1 Q3.3
N$16: L2.1 L3.2
N$17: L2.2 U1.P$B3
N$18: C2-EP-DR.1 D2.1 D4.2
N$19: R1_EP_DR.1 R1_TYPE_SEL.2 SJ1.2
N$20: EPD_C2.1 J1.4
N$21: EPD_C1.1 J1.5
N$22: EPD_C6.2 J1.18
N$23: EPD_C7.2 J1.19
N$24: EPD_C8.2 J1.20
N$25: J4.A5 R1_USB.2
N$26: EPD_C10.2 J1.22
N$27: C13.1 U1.P$A18
N$29: EPD_C12.2 J1.24
N$30: C32.1 IC2.A2
N$35: J4.B5 R2_USB.1
OUT+: IC2.A3 TP_OP.TP
OUT-: IC2.C3 TP_ON.TP
P0.04: U1.P$J1
P0.09: U1.P$L24
P0.13/1.5D: C30.2 R5.1 SW_UP.2
P0.13/2.6C: U1.P$AD8
P0.14/1.5D: C31.2 R8.1 SW_ENT.2
P0.14/2.7C: U1.P$AC9
P0.19: U1.P$AC15
P0.20: U1.P$AD16
P0.21: U1.P$AC17
P0.22: U1.P$AD18
P0.23: U1.P$AC19
P0.24: U1.P$AD20
P0.25: U1.P$AC21
P0.26: U1.P$G1
P0.27: U1.P$H2
P0.28: U1.P$B11
P0.29: U1.P$A10
P0.30: U1.P$B9
P0.31: U1.P$A8
P1.01/1.6C: Q1.1 R_PWR_EPD.1
P1.01/2.4B: U1.P$Y23
P1.02/1.6C: C29.2 R7.1 SW_DN.2
P1.02/2.8C: U1.P$W24
P1.03: U1.P$V23
P1.04: U1.P$U24
P1.05: U1.P$T23
P1.06: U1.P$R24
P1.07: U1.P$P23
P1.09: U1.P$R1
P1.10: U1.P$A20
P1.11: U1.P$B19
P1.12: U1.P$B17
P1.13: U1.P$A16
P1.14: U1.P$B15
P1.15: U1.P$A14
PMIC_INT: IC1.A1 U1.P$T2
PREVGH: D5.1 EPD_C9.2 J1.21
PREVGL: D2.2 EPD_C11.2 J1.23
RESE: J1.3 Q3.2 R1_EP_DR.2
RESET: J2.6 TP_RESET.TP U1.P$AC13
RF: ANT1.1 C4.1 C22.1 L1.2
SCK: J1.13 U1.P$A12
SCL/1.4C: IC2.C1 U3.7
SCL/2.4C: IC1.B1 IC3.12 R4.1 R17.2 TP_SCL.TP U1.P$M2
SDA/1.4C: IC2.B2 U3.8
SDA/2.4C: IC1.C1 IC3.2 R2.1 R18.2 TP_SDA.TP U1.P$L1
SWDCLK: J2.4 TP_SWDCLK.TP U1.P$AA24
SWDIO: J2.2 TP_SWDIO.TP U1.P$AC24
SWO: TP_SWO.TP U1.P$AD22
VBAT/1.2A: C27.2 TP_VBAT.TP U3.2 U3.3
VBAT/2.5C [POWER]: C37.2 IC1.C2
VBUS/1.5D: C42.1 C43.1 D3.5 J4.A4_B9 J4.A9_B4
VBUS/2.6D [POWER]: C21.1 C38.2 IC1.A2 U1.P$AD2
VREG [POWER]: C23.1 C24.2 C39.1 IC1.B2 IC9.A1 IC9.A2 IC9.A3 TP_VREG.TP

## Tracks (layer width: path | path; a pad name or v marks a point on that pad's centre or on a via)
3V3/1.7D  (via drill 0.35)
  Top 0.15: 32.62,6.1 32.96,5.76 33.11,5.76 R7.2 | 32.62,6.1 32.58,6.14 32.58,7.42 32.73,7.58 33.04,7.58 35.34,9.88 C34.2 | 11.83,21.83 11.11,21.11 Q1.2 | 11.83,21.83 11.87,21.86 11.87,22.85 R_PWR_EPD.2 | IC2.C2 31.15,9.69 29.48,8.03 29.48,7.95 27.44,5.91 26.08,5.91 R8.2 26.01,5.91 v25.02,4.93 | v22.83,4.93 22.15,4.93 R5.2 | v12.02,21.79 11.87,21.79 11.83,21.83 | v32.36,6.06 32.58,6.06 32.62,6.1
  Bottom 0.15: v12.02,21.79 12.02,21.64 22.83,10.83 v22.83,4.93 v25.02,4.93 25.25,4.7 28.05,4.7 29.41,6.06 v32.36,6.06
3V3/2.4A  (via drill 0.35)  (1 unrouted)
  Top 0.3: 30.16,13.09 30.32,13.25 U1.P$AD23 | 30.16,13.09 29.94,12.87 28.05,12.87 27.82,13.09 27.82,13.25 U1.P$AD14 | v30.09,20.43 29.79,20.13 29.79,19.82 U1.P$A22 | v29.18,21.33 28.58,21.33 28.43,21.18 C14.1 | v31.75,15.14 32.13,14.76 32.13,14.46 C8.1 33.59,14.41 34.21,13.79 v34.21,13.64 | v33.87,21.64 34.47,21.64 C12.1 | v30.54,12.72 30.16,13.09 | v35.83,23.53 36.89,24.59 TP_3V3.TP | 17.77,23.38 18.37,22.77 18.37,22.62 R17.1 | 17.77,23.38 17.69,23.45 17.54,23.45 IC9.E3 | 21.77,22.32 20.41,20.96 19.66,20.96 19.2,20.5 18.45,20.5 R18.1 | 21.77,22.32 21.77,23.15 C25.1 21.7,23.3 20.87,24.13 18.52,24.13 17.77,23.38 | 18.14,9.16 17.16,10.15 17.16,10.83 C19.1 | 18.14,9.16 18.3,9.01 18.37,9.01 IC3.10 | v19.35,6.67 19.35,7.42 IC3.3 | 18.14,9.16 v17.61,8.63 | v18.45,10.52 18.6,10.52 19.88,9.24 19.88,9.01 IC3.7 | 24.27,14.76 24.57,14.76 24.72,14.61 U1.P$Y2 | 24.27,14.76 U1.P$W1 | 23.66,13.32 24.19,13.85 24.19,14.68 24.27,14.76 | 23.66,13.32 23.66,12.49 C6.1 | 24.27,22.02 24.27,19.44 | 24.27,19.44 24.27,19.37 U1.P$B1 | 24.27,22.02 25.4,23.15 C33.1 | 23.66,13.32 23.06,13.93 v22.98,13.93 | 24.27,19.44 v23.59,19.44 | v21.02,30.71 21.55,30.18 21.55,29.35 TP_3.3V.TP | 24.27,22.02 24.04,22.24 21.85,22.24 21.77,22.32 | v37.89,9.41 39.86,9.41 J2.1
  Route63 0.3: v18.45,10.52 19.58,10.52 v22.98,13.93
  Bottom 0.3: v29.18,21.33 v30.09,20.43 30.16,20.35 31.68,20.35 32.13,19.9 | 32.13,19.9 32.58,19.44 32.58,18.99 31.75,18.16 v31.75,15.14 30.54,13.93 v30.54,12.72 | 32.13,19.9 v33.87,21.64 33.94,21.64 34.55,22.24 | 34.55,22.24 v35.83,23.53 | v19.35,6.67 19.35,6.9 v17.61,8.63 18.45,9.47 v18.45,10.52 | v22.98,13.93 22.98,15.21 22.91,15.29 22.91,17.48 23.59,18.16 v23.59,19.44 22.76,20.28 22.76,31.24 | v21.02,30.71 21.02,32.9 21.77,33.66 22.23,33.66 22.76,33.13 22.76,31.24 | 34.55,22.24 31.07,25.72 31.07,30.33 30.16,31.24 22.76,31.24 | v34.21,13.64 37.88,9.97 v37.88,9.41 v37.89,9.41
ALERT  (1 unrouted)
D+  (via drill 0.35)
  Top 0.15: v25.86,12.64 25.78,12.72 25.78,13.25 U1.P$AD6 | v33.64,24.13 33.64,24.44 38.56,29.35 39.46,29.35 41.5,31.39 41.96,31.39 D3.4
  Route2 0.15: v25.86,12.64 23.66,14.83 23.44,14.83 22.98,15.29 22.98,16.57 30.54,24.13 v33.64,24.13
D-  (via drill 0.35)
  Top 0.15: v24.87,12.64 25.25,13.02 25.25,13.25 U1.P$AD4 | v34.93,24.81 35.38,24.81 41.43,30.86 42.71,30.86 42.87,31.01 42.87,32.75 42.34,33.28 42.03,33.28 D3.6
  Route2 0.15: v24.87,12.64 24.87,12.94 22.68,15.14 22.68,16.72 30.77,24.81 v34.93,24.81
DEC1
  Top 0.15: U1.P$C1 24.19,18.77 22.15,18.77 21.32,17.93 21.32,17.71 C5.1
DEC3
  Top 0.15: U1.P$D23 30.32,18.61 30.62,18.61 30.69,18.69 31.45,18.69 31.6,18.54 34.7,18.54 35.08,18.92 35.08,19.07 C11.1
DEC4_6  (via drill 0.35)  (1 unrouted)
  Top 0.15: C16.1 32.43,23.22 31.83,23.22 31.6,23.45 30.84,23.45 30.32,22.92 C15.1 30.24,22.92 28.88,22.92 28.35,23.45 L3.1 28.27,23.53 v27.44,24.36 | v25.78,20.96 25.48,20.66 25.48,19.37 U1.P$B5 | v34.17,17.86 33.79,18.24 30.77,18.24 U1.P$E24
  Route63 0.15: v34.17,17.86 27.67,24.36 v27.44,24.36
  Bottom 0.15: v25.78,20.96 25.78,22.7 v27.44,24.36
DN  (via drill 0.35)
  Top 0.15: 32.92,29.39 33.11,29.2 33.11,28.67 J4.B7 | 32.92,29.39 32.89,29.42 32.36,29.42 32.21,29.27 32.21,28.67 J4.A7 | v37.88,32.9 38.25,33.28 39.46,33.28 D3.1 | v32.96,29.73 32.96,29.42 32.92,29.39
  Bottom 0.15: v37.88,32.9 36.14,31.16 34.4,31.16 v32.96,29.73
DP
  Top 0.15: J4.A6 32.58,28.59 32.58,27.99 32.36,27.76 31.9,27.76 31.68,27.99 31.68,28.59 J4.B6 31.68,28.67 31.68,29.35 33.72,31.39 39.46,31.39 D3.3
EPD_3V3  (via drill 0.35)  (1 unrouted)
  Top 0.15: J1.16 10.28,10.83 10.28,11.2 J1.15 10.21,11.28 9.83,11.28 v9.3,11.81 | v3.33,26.02 3.33,25.57 2.87,25.11 2.12,25.11 1.59,25.64 C1-EP-DR.1 | v4.99,27.69 4.99,28.67 6.35,30.03 L5.2 | v9.3,22.32 10.13,23.15 Q1.3
  Bottom 0.15: v4.99,27.69 v3.33,26.02 3.48,26.1 8.28,21.3 | v9.3,11.81 9.3,12.34 8.54,13.09 8.54,21.03 8.28,21.3 | 8.28,21.3 v9.3,22.32
EPD_BUSY  (1 unrouted)
EPD_CS  (1 unrouted)
EPD_DC  (via drill 0.35)
  Top 0.15: v29.18,11.89 28.2,11.89 26.84,13.25 U1.P$AD10 | v9.3,13.25 10.21,13.25 J1.11
  Route2 0.15: v29.18,11.89 29.18,10.98 28.73,10.52 27.22,10.52 25.78,11.96 15.12,11.96 14.21,12.87 9.68,12.87 v9.3,13.25
EPD_RST  (1 unrouted)
GDR
  Top 0.15: R2_EP_DR.2 15.27,29.88 15.27,28.06 Q3.1 15.2,27.99 14.21,27.99 13.23,27 10.36,27 9.53,26.17 9.53,24.66 8.54,23.68 8.54,19.07 9.83,17.78 10.21,17.78 J1.2
GND  (via drill 0.35)  (4 unrouted)
  Top 0.3: C1-EP-DR.2 2.57,25.72 2.57,26.25 3.25,26.93 6.88,26.93 8.09,28.14 8.09,32.3 D4.1 8.24,32.45 10.28,32.45 11.34,33.51 13.61,33.51 U3.1 13.76,33.51 14.21,33.51 14.67,33.05 14.67,32.83 U3.9 14.82,32.75 14.97,32.6 15.65,32.6 U3.6 15.8,32.52 16.25,32.52 17.16,31.62 TP_GND.TP | C27.1 19.5,33.13 18.75,33.13 17.92,32.3 TP_GND.TP | 14.21,26.93 14.59,27.31 16.18,27.31 16.71,26.78 17.99,26.78 18.22,27 18.22,29.2 16.93,30.48 16.93,31.24 17.84,32.15 TP_GND.TP | 14.21,26.93 13.91,26.63 11.34,26.63 10.36,25.64 10.36,25.34 SJ1.1 | EPD_C9.1 12.17,11.81 12.17,12.87 EPD_C8.1 12.32,13.02 12.32,14.15 EPD_C7.1 12.32,14.3 13.15,15.14 | 13.15,15.14 13.15,15.29 EPD_C6.1 13.23,15.44 13.23,16.65 EPD_C5.1 13.31,16.8 13.31,16.95 15.42,19.07 C17.1 15.42,19.22 14.29,20.35 | EPD_C2.2 12.25,18.08 12.25,19.29 EPD_C1.2 12.25,19.44 12.93,20.13 13.68,20.13 C24.1 13.84,20.2 14.14,20.2 14.29,20.35 | 14.29,20.35 15.5,21.56 | 15.5,21.56 16.33,22.39 16.33,22.55 IC9.B1 | v13.61,23.45 12.93,23.45 R1_TYPE_SEL.1 | v15.35,21.71 15.5,21.56 | v14.52,29.88 15.04,30.41 15.27,30.41 R2_EP_DR.1 | 20.18,3.95 21.92,2.21 22.83,2.21 C31.1 | 20.18,3.95 19.58,3.95 SW_UP.1 | 20.26,5.23 22.68,7.65 22.68,9.16 22.45,9.39 22.23,9.39 R3.1 | 20.26,5.23 20.26,4.02 20.18,3.95 | 9.37,10.68 8.54,11.51 8.54,13.55 9.75,14.76 10.21,14.76 J1.8 | 9.37,10.68 9.75,10.3 10.21,10.3 J1.17 | 15.35,6.22 15.04,6.22 13.46,7.8 | 13.46,7.8 13.23,8.03 EPD_C12.1 13.31,8.18 13.31,9.31 EPD_C11.1 13.23,9.47 13.23,10.6 EPD_C10.1 13.38,10.6 16.1,10.6 17.16,11.66 17.24,11.66 | 15.35,6.22 C30.1 | 18.9,9.01 19.35,9.01 IC3.8 | 18.9,9.01 IC3.9
  Top 0.3: 18.9,9.01 18.9,9.24 18.67,9.47 18.52,9.47 17.69,10.3 17.69,10.83 C19.2 17.69,10.98 17.69,11.2 17.24,11.66 | 17.24,11.66 17.24,13.09 | 17.24,13.09 17.24,17.86 17.46,18.08 17.46,18.69 C18.1 | 9.37,10.68 8.54,9.84 8.54,6.97 9.53,5.99 11.64,5.99 13.46,7.8 | 20.26,5.23 20.18,5.31 18.9,5.31 17.54,6.67 15.57,6.67 15.35,6.44 15.35,6.22 | 17.24,13.09 16.18,13.09 14.21,15.06 13.23,15.06 13.15,15.14 | v14.14,27 14.21,26.93 | 33.57,20.05 34.55,19.07 C11.2 34.62,19.29 34.62,19.44 34.85,19.67 35.38,19.67 38.1,16.95 38.1,16.88 38.33,16.65 40.07,16.65 | 33.57,20.05 C10.2 | 40.07,16.65 40.07,17.03 40.37,17.33 X1.2 | 40.07,16.65 40.07,15.21 C4.2 | v23.51,20.5 23.29,20.5 20.79,18.01 20.79,17.4 21.09,17.1 21.55,17.1 21.77,17.33 21.77,17.63 C5.2 | U1.P$F23 30.24,18.08 29.56,18.08 29.33,18.31 U1.P$74 | U1.P$74 25.78,18.39 26.01,18.61 U1.P$B7 26.01,19.44 25.86,19.6 25.86,19.97 26.99,21.11 27.37,21.11 C14.2 | U1.P$87 25.7,15.89 U1.P$74 | U1.P$83 25.7,15.97 U1.P$74 | U1.P$84 26.91,15.97 26.76,16.12 U1.P$74 | U1.P$85 28.05,15.97 27.59,16.42 U1.P$74 | U1.P$79 25.78,17.18 26.31,17.71 U1.P$74 | U1.P$80 26.91,17.18 U1.P$74 | U1.P$76 26.91,18.31 26.46,17.86 U1.P$74 | U1.P$81 28.12,17.18 U1.P$74 | U1.P$82 29.26,17.18 28.8,17.63 U1.P$74 | U1.P$77 28.12,18.31 28.65,17.78 U1.P$74 | U1.P$78 29.33,18.39 U1.P$74 | U1.P$75 25.7,18.39 U1.P$74 | 33.57,20.05 32.73,19.22 v31.83,19.22 | 32.73,15.36 32.73,15.82 C9.2 | 32.73,15.36 32.73,14.46 C8.2 | 32.73,15.36 34.85,15.36 C3.2 34.93,15.21 34.93,14.98 35.83,14.08 35.83,9.39 | 35.83,9.39 35.83,6.9 37.5,5.23 37.5,4.02 SW_DN.1 | IC2.B1 30.62,10.22 30.16,10.22 29.18,9.24 C32.2 29.03,9.31 27.67,10.68 27.52,10.68 C7.2 27.52,10.52 27.52,10.45 27.14,10.07
  Top 0.3: C6.2 22.6,12.41 22.6,10.98 C20.2 22.6,10.83 23.13,10.3 23.96,10.3 24.72,11.05 | 24.72,11.05 25.18,11.51 25.33,11.51 C21.2 | 27.14,10.07 26.91,9.84 25.93,9.84 24.72,11.05 | v32.28,10 32.05,10.22 31.68,10.22 IC2.B3 | v27.82,5.38 28.5,4.7 28.5,4.02 SW_ENT.1 | v27.37,9.84 27.14,10.07 | v35.76,9.39 35.83,9.39 | 25.86,23.83 25.1,23.83 24.49,23.22 22.83,23.22 C25.2 | 25.86,23.83 26.46,23.22 C33.2 | 27.97,27.38 27.37,27.38 R1_USB.1 27.22,27.46 27.14,27.46 26.84,27.16 26.84,26.63 26.91,26.55 26.91,25.8 | 27.97,27.38 28.2,27.16 R2_USB.2 | 27.97,27.38 28.05,27.46 28.05,29.12 J4.SH4 27.97,29.27 27.97,31.16 26.95,32.18 | 24.57,31.77 25.63,31.77 26.31,32.45 26.46,32.45 R9.1 26.61,32.52 26.95,32.18 | 24.57,31.77 24.12,31.77 IC1.D2 | 24.57,31.77 24.57,33.13 24.27,33.43 23.51,33.43 22.23,32.15 21.77,32.15 21.7,32.22 21.32,32.22 C39.2 | 26.91,25.8 25.93,24.81 25.93,23.91 25.86,23.83 | 26.95,32.18 28.05,33.28 J4.SH2 | C22.2 41.81,15.21 41.81,16.72 42.11,17.03 C2.2 42.11,17.18 41.66,17.63 41.66,18.54 41.88,18.77 42.41,18.77 | 42.41,18.77 42.64,18.54 42.64,18.24 C1.2 | 38.93,19.97 38.93,18.61 X1.4 | 38.93,19.97 39.84,20.88 TP_BAT_GND.TP 39.99,21.03 39.99,22.77 41.81,24.59 43.24,24.59 43.39,24.44 43.39,20.28 42.49,19.37 42.49,18.84 42.41,18.77 | J4.SH1 36.74,33.28 36.74,33.05 37.65,32.15 38.1,32.15 38.25,32.3 39.46,32.3 D3.2 39.61,32.3 39.99,32.3 40.45,31.84 40.45,31.01 40.22,30.78 38.33,30.78 36.74,29.2 J4.SH3 36.74,29.05 36.74,28.97 32.13,24.36 | 32.66,22.62 32.66,21.86 C13.2 | 32.96,22.92 32.66,22.62 | 32.96,22.92 32.96,23.15 C16.2 32.96,23.3 32.96,23.53 32.13,24.36
  Top 0.3: 32.96,22.92 33.04,22.85 34.25,22.85 35.08,22.02 35.08,21.71 C12.2 35.15,21.64 36.74,20.05 38.86,20.05 38.93,19.97 | 32.13,24.36 31.9,24.59 30.24,24.59 C43.2 30.16,24.51 29.64,23.98 28.8,23.98 27.67,25.11 27.59,25.11 26.91,25.8 | 32.66,22.62 32.21,22.62 31.98,22.85 31.3,22.85 C15.2 | v35.76,9.39 36.35,8.79 36.35,7.24 37.65,5.94 40.01,5.94 40.16,6.1 40.16,8.56 41.05,9.44 J2.3 J2.5 | C29.1 34.2,7.18 35.21,8.19 35.21,8.84 v35.76,9.39 | C34.1 34.03,10.03 v34,10
  Route2 0.3: v34,10 32.61,8.61 32.4,8.61 32.28,8.73 v32.28,10
  Bottom 0.3: 14.52,27 14.52,24.36 v13.61,23.45 v15.35,21.71 15.42,21.64 15.42,19.75 22,13.17 24.12,13.17 25.63,14.68 U1.P$87 25.78,14.76 26.76,14.76 U1.P$88 26.99,14.68 27.44,14.68 27.75,14.38 | 14.52,27 v14.52,29.88 | 14.52,27 v14.14,27 | U1.P$75 25.7,18.31 v23.51,20.5 23.59,20.58 23.59,24.36 28.05,28.82 28.05,29.12 J4.SH4 | v31.83,19.22 30.16,19.22 29.33,18.39 U1.P$78 | 28.27,7.58 28.73,7.58 31.15,10 v32.28,10 32.89,9.39 v35.76,9.39 | 28.27,7.58 27.75,8.11 27.75,9.84 | 27.75,14.38 27.75,9.84 | 27.75,14.38 28.05,14.68 U1.P$89 28.2,14.76 29.26,14.76 U1.P$90 29.26,14.91 29.26,15.89 U1.P$86 | v27.82,5.38 27.82,7.12 28.27,7.58 | 27.75,9.84 v27.37,9.84
  pour Route2 (isolate 0.254, no thermals): 1,35 45,35 45,34 46,33 46,0 1,0 0,1 0,6 7,6 7,20 0,20 0,34
  pour Top (no thermals): 0,35 47,35 47,2 45,0 0,0 0,6 7,6 7,20 0,20
  pour Bottom (no thermals): 0,35 46,35 46,0 0,0 0,6 7,6 7,20 0,20
HAPTIC_EN  (via drill 0.35)
  Top 0.15: v23.66,15.51 23.81,15.36 24.19,15.36 U1.P$U1 | v28.5,11.2 30.16,11.2 30.62,10.75 IC2.A1
  Route2 0.15: v23.66,15.51 24.04,15.51 28.35,11.2 v28.5,11.2
IMU_INT1
  Top 0.15: U1.P$N1 24.19,16.27 23.21,16.27 20.34,13.4 20.34,8.18 20.18,8.03 19.96,8.03 IC3.5
IMU_INT2  (1 unrouted)
LX1  (via drill 0.35)
  Top 0.15: IC9.B2 16.33,23.07 16.33,23.38 IC9.B3 16.33,23.45 16.33,23.75 16.41,23.83 16.41,25.11 16.33,25.19 16.33,25.49 16.86,26.02 v17.99,26.02 | v20.49,26.02 20.79,26.02 24.04,29.27 L7.1
  Bottom 0.15: v20.49,26.02 v17.99,26.02
LX2  (via drill 0.35)
  Top 0.15: IC9.D2 17.09,23.07 17.09,23.38 IC9.D3 17.09,23.45 17.09,23.6 18.37,24.89 23.13,24.89 v23.51,25.27 | v23.81,27 26.08,29.27 L7.2
  Bottom 0.15: v23.51,25.27 23.51,26.7 v23.81,27
MOSI  (1 unrouted)
N$1
  Top 0.15: IC1.D1 23.66,31.77 23.66,31.62 23.96,31.31 25.93,31.31 26.46,31.84 R9.2
N$3
  Top 0.15: IC9.D1 17.09,22.55 17.09,20.2 16.86,19.97 16.71,19.97 R4.2
N$5
  Top 0.15: IC9.E1 17.46,22.55 17.46,20.73 17.39,20.66 17.39,20.2 17.61,19.97 17.77,19.97 R2.2
N$6
  Top 0.15: IC3.1 18.45,7.42 18.45,6.67 19.13,5.99 19.58,5.99 22.15,8.56 22.15,8.86 R3.2
N$7
  Top 0.15: U1.P$AC5 25.48,13.78 25.02,13.78 24.87,13.62 24.57,13.62 24.19,13.25 24.19,11.58 23.59,10.98 C20.1
N$8  (1 unrouted)
  Top 0.15: C17.2 15.95,19.14 15.95,17.25 15.57,16.88 X2.1
N$9  (via drill 0.35)
  Top 0.15: v22.53,18.08 22.6,18.16 24.42,18.16 24.49,18.08 24.72,18.08 U1.P$F2 | v19.81,16.88 18.07,16.88 X2.2 17.99,16.88 C18.2
  Route2 0.15: v22.53,18.08 21.02,18.08 v19.81,16.88
N$10
  Top 0.15: U1.P$N24 30.77,16.27 31.83,16.27 32.21,15.89 C9.1
N$11
  Top 0.15: 35.27,15.7 35.38,15.59 35.38,15.36 C3.1 | 35.27,15.7 33.34,17.63 30.62,17.63 30.54,17.56 30.32,17.56 U1.P$H23 | L1.1 36.67,15.74 35.3,15.74 35.27,15.7
N$13  (via drill 0.35)
  Top 0.15: 37.84,18.35 38.86,17.33 X1.1 | 37.84,18.35 35.46,20.73 32.43,20.73 31.07,19.37 30.77,19.37 U1.P$B24 | v43.39,18.08 43.02,17.71 42.49,17.71 42.19,18.01 42.19,18.16 C1.1 | v37.88,18.39 37.84,18.35
  Bottom 0.15: v43.39,18.08 41.28,20.2 39.69,20.2 v37.88,18.39
N$14  (via drill 0.35)  (1 unrouted)
  Top 0.15: v43.39,17.1 42.71,17.1 C2.1 | v40.98,19.52 40.98,19.14 40.45,18.61 X1.3
  Bottom 0.15: v40.98,19.52 v43.39,17.1
N$15  (via drill 0.35)
  Top 0.15: 2.83,24.25 3.1,24.51 3.17,24.51 3.63,24.96 7.18,24.96 7.79,24.36 D5.2 7.56,24.66 10.21,27.31 10.36,27.31 13.91,30.86 15.5,30.86 17.31,29.05 17.31,27.38 Q3.3 | 2.83,24.25 2.19,23.6 C2-EP-DR.2 | v2.04,26.85 1.89,27 1.89,30.03 L5.1 | 2.83,24.25 v2.95,24.13
  Bottom 0.15: v2.04,26.85 2.04,25.04 v2.95,24.13
N$16
  Top 0.15: L2.1 28.58,22.39 28.05,22.92 27.82,22.92 27.29,23.45 L3.2
N$17
  Top 0.15: U1.P$B3 25.02,19.37 25.02,21.11 26.23,22.32 27.59,22.32 L2.2
N$18
  Top 0.15: C2-EP-DR.1 1.66,23.6 1.66,23.75 2.72,24.81 3.02,24.81 4.76,26.55 7.41,26.55 9.22,28.37 D2.1 9.3,28.44 11.57,30.71 11.57,32.3 D4.2
N$19
  Top 0.15: R1_TYPE_SEL.2 12.85,22.92 12.7,23.07 12.62,23.07 12.32,23.38 12.32,24.89 11.95,25.27 SJ1.2 12.32,24.96 12.78,25.42 15.42,25.42 R1_EP_DR.1
N$20
  Top 0.15: EPD_C2.1 13.23,18.01 12.47,17.25 11.11,17.25 10.66,16.8 10.28,16.8 J1.4
N$21  (via drill 0.35)
  Top 0.15: v13.99,18.77 13.46,19.29 13.23,19.29 EPD_C1.1 | v11.49,16.12 10.73,16.12 10.66,16.19 10.28,16.19 J1.5
  Bottom 0.15: v13.99,18.77 13.99,18.61 v11.49,16.12
N$22
  Top 0.15: EPD_C6.2 12.17,15.36 12.17,14.98 10.89,13.7 10.89,10.07 10.58,9.77 10.28,9.77 J1.18
N$23  (via drill 0.35)
  Top 0.15: v13.91,13.55 13.31,14.15 EPD_C7.2 | v9.3,9.62 9.53,9.62 9.83,9.31 10.21,9.31 J1.19
  Bottom 0.15: v13.91,13.55 13.23,13.55 v9.3,9.62
N$24
  Top 0.15: EPD_C8.2 13.23,12.87 14.21,12.87 14.67,12.41 14.67,11.96 13.91,11.2 11.87,11.2 11.19,10.52 11.19,9.31 10.66,8.79 10.28,8.79 J1.20
N$25
  Top 0.15: R1_USB.2 27.37,26.85 27.82,26.4 27.82,26.33 27.97,26.17 31.83,26.17 33.64,27.99 J4.A5
N$26  (1 unrouted)
N$27
  Top 0.15: U1.P$A18 28.8,19.82 28.8,20.05 30.09,21.33 32.96,21.33 33.11,21.49 33.11,21.79 C13.1
N$29
  Top 0.15: EPD_C12.2 12.17,8.03 11.87,8.03 10.66,6.82 10.28,6.82 J1.24
N$30  (via drill 0.35)
  Top 0.15: v30.92,11.36 31.15,11.13 31.15,10.75 IC2.A2 | v28.5,8.33 28.5,8.86 28.2,9.16 C32.1
  Bottom 0.15: v30.92,11.36 30.92,10.75 v28.5,8.33
N$35
  Top 0.15: R2_USB.1 28.27,26.55 29.18,26.55 30.62,27.99 30.62,28.59 J4.B5
OUT+
  Top 0.15: IC2.A3 31.68,10.68 32.51,10.68 32.96,10.22 32.96,8.26 31.6,6.9 31.6,3.27 TP_OP.TP
OUT-
  Top 0.15: IC2.C3 31.6,9.69 31.6,7.95 29.41,5.76 TP_ON.TP
P0.13/1.5D  (via drill 0.35)
  Top 0.15: 16.67,5.35 16.71,5.31 16.71,4.02 SW_UP.2 | 16.67,5.35 15.8,6.22 C30.2 | v21.39,5.38 22.07,5.38 R5.1 | v17.84,5.38 16.71,5.38 16.67,5.35
  Bottom 0.15: v17.84,5.38 v21.39,5.38
P0.14/1.5D
  Top 0.15: 25.14,3.91 25.18,3.95 25.7,3.95 SW_ENT.2 | 25.14,3.91 23.44,2.21 23.29,2.21 C31.2 | 25.14,3.91 24.34,4.7 24.34,5.16 25.63,6.44 26.01,6.44 R8.1
P1.01/1.6C
  Top 0.15: R_PWR_EPD.1 11.64,23.45 9.22,21.03 Q1.1
P1.02/1.6C
  Top 0.15: C29.2 33.34,7.12 33.34,6.44 33.19,6.29 R7.1 33.26,6.29 34.7,4.85 34.7,4.02 SW_DN.2
PMIC_INT  (1 unrouted)
PREVGH  (via drill 0.35)
  Top 0.15: EPD_C9.2 13.61,11.81 v13.99,12.19 | v11.57,8.79 11.11,8.79 10.66,8.33 10.28,8.33 J1.21 | v5.22,23.38 4.31,24.28 D5.1
  Bottom 0.15: v13.99,12.19 13.99,11.2 v11.57,8.79 11.57,8.86 9.15,8.86 8.24,9.77 8.24,20.43 7.64,21.03 7.56,21.03 v5.22,23.38
PREVGL  (via drill 0.35)
  Top 0.15: 9.64,7.01 9.83,7.2 10.21,7.2 J1.23 | 9.64,7.01 9.6,6.97 9.6,6.52 9.75,6.37 11.42,6.37 12.7,7.65 12.7,8.48 12.32,8.86 12.32,9.39 EPD_C11.2 | v11.72,27.69 12.4,28.37 12.78,28.37 D2.2 | 9.64,7.01 v9.3,7.35
  Bottom 0.15: v11.72,27.69 11.72,22.39 10.81,21.49 10.81,15.89 12.47,14.23 14.14,14.23 14.67,13.7 14.67,10.98 11.04,7.35 v9.3,7.35
RESE
  Top 0.15: Q3.2 15.27,26.7 15.88,26.1 15.88,25.27 15.57,24.96 15.5,24.96 R1_EP_DR.2 15.42,24.89 15.04,24.51 15.04,23.83 11.72,20.5 11.72,18.39 10.66,17.33 10.28,17.33 J1.3
RESET  (via drill 0.35)
  Top 0.152: TP_RESET.TP 42.24,4.24 45.16,7.16 45.16,9.91 45.07,10 43,10 42.44,10.56 J2.6
  Top 0.3: v44.36,13.24 44.36,12.64 J2.6
  Route2 0.3: U1.P$AC13 27.51,13.23 28.43,12.32 29.63,12.32 29.75,12.45 32.13,12.45 32.35,12.22 34.72,12.22 37.1,14.59 43.47,14.59 44.39,13.67 44.39,13.26 v44.36,13.24
  other vias: 27.51,13.8
RF
  Top 0.15: L1.2 37.8,15.74 38.33,15.21 39.46,15.21 C4.1 39.54,15.14 39.54,14.98 39.77,14.76 40.3,14.76 40.67,15.14 41.2,15.14 C22.1 41.28,15.29 41.28,18.77 42.38,19.87 ANT1.1
SCK  (1 unrouted)
SCL/1.4C  (via drill 0.35)
  Top 0.15: v22,14.15 22,10.6 22.68,9.92 25.1,9.92 27.37,7.65 28.73,7.65 29.18,8.11 29.18,8.26 30.62,9.69 IC2.C1 | v22,32.9 20.79,32.9 20.11,33.58 16.56,33.58 16.1,33.13 15.72,33.13 U3.7
  Bottom 0.15: v22,14.15 22,17.71 21.85,17.86 21.85,32.75 v22,32.9
SCL/2.4C  (via drill 0.35)  (2 unrouted)
  Top 0.15: 18.9,22.09 19.66,22.09 19.81,22.24 TP_SCL.TP 18.9,22.09 | 18.9,22.09 18.45,22.09 R17.2 | v16.63,8.71 17.39,7.95 18.3,7.95 IC3.12 | v16.41,13.85 16.41,19.52 16.25,19.67 16.25,20.13 16.63,20.5 R4.1 16.63,20.58 16.41,20.81 v16.41,21.18 | 18.9,22.09 18.9,23.22 v18.75,23.38
  Bottom 0.15: v16.63,8.71 16.63,13.62 v16.41,13.85 | v18.75,23.38 18.6,23.38 v16.41,21.18
SDA/1.4C  (via drill 0.35)
  Top 0.3: v17.61,34.15 16.61,34.15 16.02,33.56 U3.8
  Route63 0.3: IC2.B2 17.59,23.82 17.59,34.13 v17.61,34.15
  other vias: 31.17,10.24
SDA/2.4C  (via drill 0.35)  (1 unrouted)
  Top 0.15: 19.77,17.82 19.73,17.86 19.73,19.22 TP_SDA.TP 19.66,19.29 19.05,19.9 18.45,19.9 R18.2 | 19.77,17.82 20.83,16.76 | 20.83,16.76 20.87,16.72 21.77,16.72 21.85,16.8 24.19,16.8 U1.P$L1 | v19.13,8.18 18.9,7.95 18.9,7.5 IC3.2 | v19.13,11.28 19.13,15.06 20.83,16.76 | v18.14,21.18 17.84,20.88 17.84,20.5 R2.1 | v19.35,17.78 19.73,17.78 19.77,17.82
  Bottom 0.15: v19.13,11.28 v19.13,8.18 | v18.14,21.18 18.14,18.99 v19.35,17.78
SWDCLK  (via drill 0.35)
  Top 0.15: v37.88,23.38 39.61,25.11 TP_SWDCLK.TP | U1.P$AA24 30.77,14.23 31.68,14.23 31.98,13.93 32.96,13.93 v33.49,14.46 39.54,14.46 41.17,12.83 J2.4
  Bottom 0.15: v33.49,14.46 33.49,18.99 v37.88,23.38
SWDIO  (via drill 0.35)
  Top 0.15: v41.28,25.8 43.62,28.14 43.62,28.44 TP_SWDIO.TP | U1.P$AC24 30.77,13.78 31.15,13.78 v31.37,13.55 32.34,13.55 32.66,13.24 v32.93,13.24 | v37,10 38,11 39.61,11 J2.2
  Bottom 0.15: v31.37,13.55 31.37,13.85 33.19,15.67 33.19,19.6 39.39,25.8 v41.28,25.8 | v32.93,13.24 36.17,10 v37,10
SWO  (1 unrouted)
VBAT/1.2A  (via drill 0.35)
  Top 0.15: U3.2 13.76,33.05 13.76,32.6 U3.3 13.68,32.52 13.31,32.52 13.08,32.3 13.08,31.84 v13.53,31.39 | 19.43,30.71 19.43,30.33 TP_VBAT.TP 19.43,30.71 | 19.43,30.71 19.43,32.45 19.96,32.98 19.96,33.13 C27.2 | 19.43,30.71 v17.69,30.71
  Bottom 0.15: v13.53,31.39 17.01,31.39 v17.69,30.71
VBAT/2.5C  (1 unrouted)
VBUS/1.5D  (via drill 0.35)  (2 unrouted)
  Top 0.15: v38.56,30.03 38.03,29.5 37.88,29.5 C42.1 | v40.82,32.45 41.88,32.45 41.96,32.37 D3.5 | v32.28,25.49 30.24,25.49 29.41,24.66 29.26,24.66 C43.1
  Bottom 0.15: v40.82,32.45 38.56,30.18 v38.56,30.03 38.56,29.35 34.7,25.49 v32.28,25.49
VBUS/2.6D  (via drill 0.35)  (2 unrouted)
  Top 0.3: v26.23,7.88 26.23,7.2 C38.2 | v26.23,10.6 26.23,11.43 26.31,11.51 C21.1
  Bottom 0.3: v26.23,10.6 v26.23,7.88
VREG  (via drill 0.35)  (2 unrouted)
  Top 0.3: 15.88,23.07 15.88,23.38 IC9.A3 15.88,23.53 15.88,23.91 v15.72,24.06 | 15.88,23.07 IC9.A2 | 15.88,23.07 15.72,23.07 13.84,21.18 C24.2 | 17.46,25.34 17.69,25.34 17.77,25.27 19.73,25.27 | 17.46,25.34 16.78,25.34 C23.1 | 19.73,25.27 22.53,25.27 23.51,26.25 25.48,26.25 TP_VREG.TP | 19.73,25.27 19.73,26.25 20.26,26.78 20.94,26.78 22.98,28.82 22.98,29.8 21.32,31.47 21.02,31.47 20.26,32.22 C39.1 | v17.46,25.19 17.46,25.34
  Bottom 0.3: v15.72,24.06 16.33,24.06 v17.46,25.19
(copper drawn outside any net)
  shapes: Bottom area x1, Route2 area x1, Route63 area x1, Top area x1